# Altium PCB WorldClock.PcbDoc (part 6 of 13)
Units mil, origin at the board's own origin, x right, y up, seen from the top; angles counter-clockwise.
Board outline 3700 x 3850 mil, 2 copper layers (Top Layer, Bottom Layer); 227 components, 134 nets, 1324 pads, 248 vias.
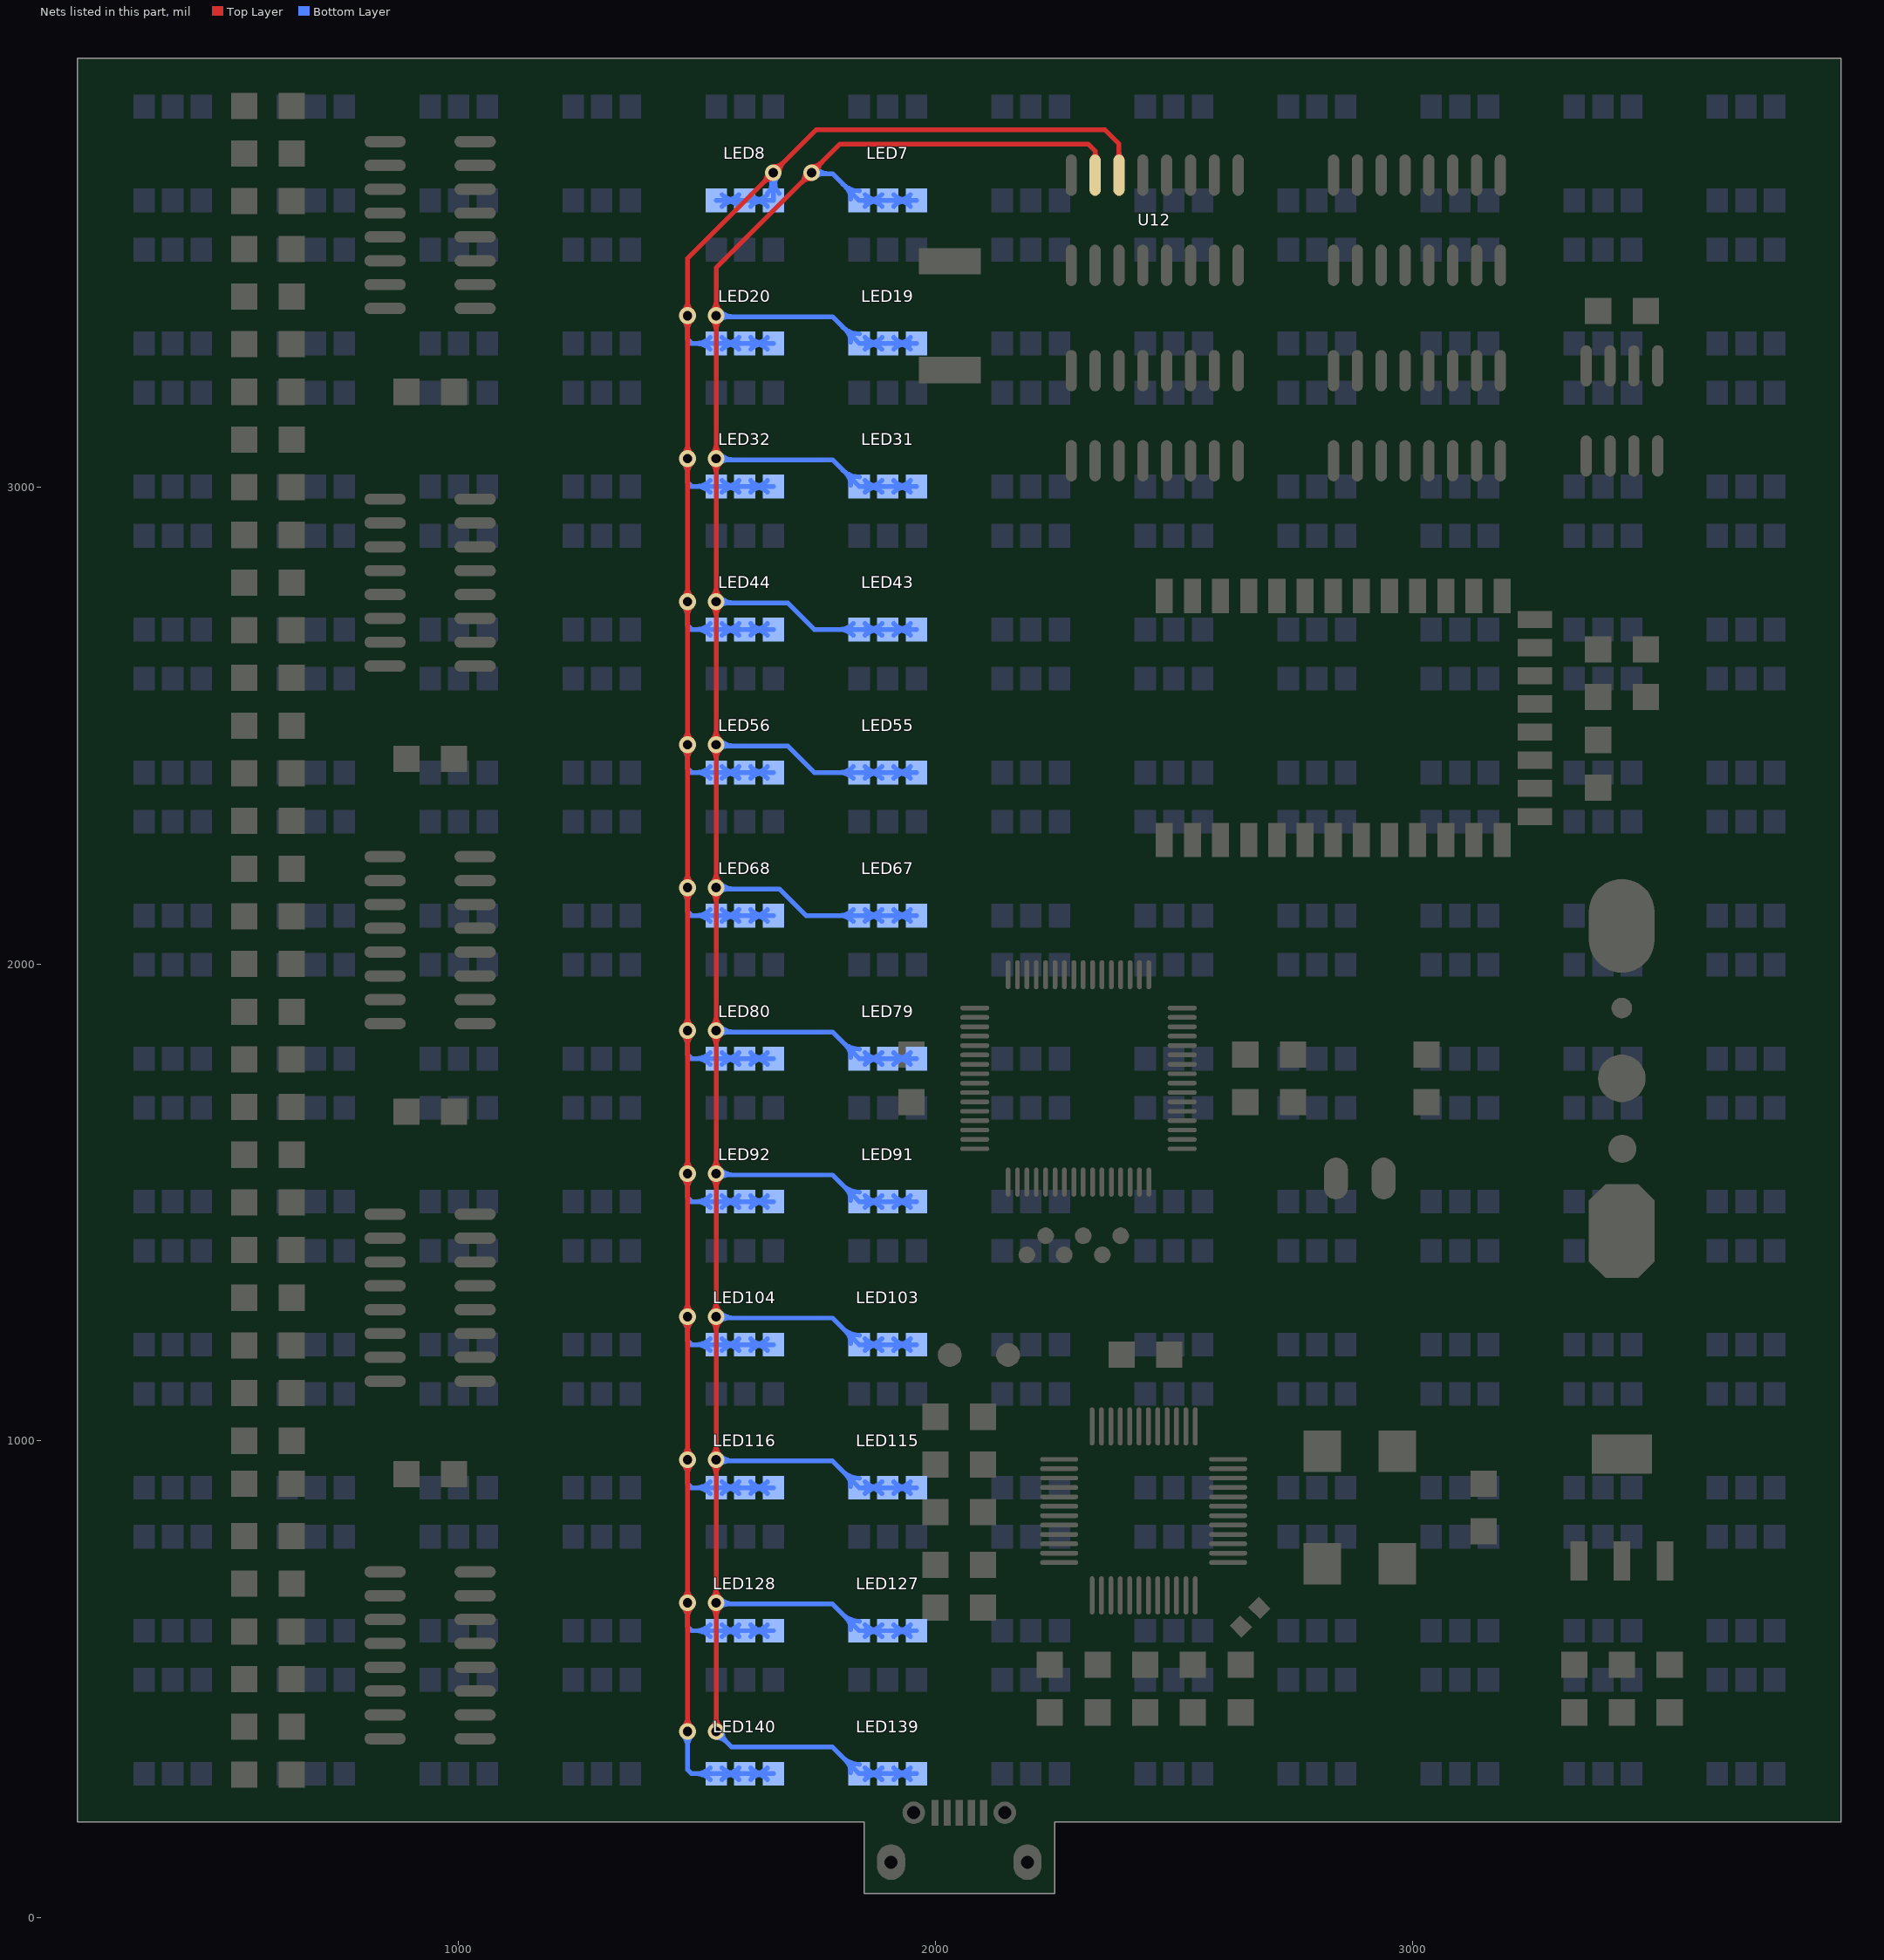
[diagram p6: the nets of this part, all layers, seen from the top]

## Via types
v1: diameter 35, hole 20, Top Layer to Bottom Layer, tented both sides, 213 vias
v2: diameter 24, hole 12, Top Layer to Bottom Layer, tented both sides, 35 vias

## Nets (pads, with @x,y where several pads share a name; then routed paths per layer and width w, separated by ;. In a path a pad name is that pad's centre, name@x,y a point inside that pad or via, vN(x,y) a via of type N, cw(c..) or ccw(c..) an arc to the next point about the centre after c; other vN are vias at no path point) (continued)
CH7: LED7.4 LED7.5 LED7.6 LED19.4 LED19.5 LED19.6 LED31.4 LED31.5 LED31.6 LED43.4 LED43.5 LED43.6 LED55.4 LED55.5 LED55.6 LED67.4 LED67.5 LED67.6 LED79.4 LED79.5 LED79.6 LED91.4 LED91.5 LED91.6 LED103.4 LED103.5 LED103.6 LED115.4 LED115.5 LED115.6 LED127.4 LED127.5 LED127.6 LED139.4 LED139.5 LED139.6 U12.15 | length 16164.9
  Top Layer w10: v1@1531.16,398.84 ccw(c1509.82,420.18) 1540,420.18 ccw(c1570.18,420.18) v1@1548.84,398.84 ; v1@1531.16,651.16 cw(c1509.82,629.82) 1540,629.82 cw(c1570.18,629.82) v1@1548.84,651.16 ; v1@1531.16,668.84 ccw(c1509.82,690.18) 1540,690.18 ccw(c1570.18,690.18) v1@1548.84,668.84 ; v1@1531.16,951.16 cw(c1509.82,929.82) 1540,929.82 cw(c1570.18,929.82) v1@1548.84,951.16 ; v1@1531.16,968.84 ccw(c1509.82,990.18) 1540,990.18 ccw(c1570.18,990.18) v1@1548.84,968.84 ; v1@1531.16,1251.16 cw(c1509.82,1229.82) 1540,1229.82 cw(c1570.18,1229.82) v1@1548.84,1251.16 ; v1@1531.16,1268.84 ccw(c1509.82,1290.18) 1540,1290.18 ccw(c1570.18,1290.18) v1@1548.84,1268.84 ; v1@1531.16,1551.16 cw(c1509.82,1529.82) 1540,1529.82 cw(c1570.18,1529.82) v1@1548.84,1551.16 ; v1@1531.16,1568.84 ccw(c1509.82,1590.18) 1540,1590.18 ccw(c1570.18,1590.18) v1@1548.84,1568.84 ; v1@1531.16,1851.16 cw(c1509.82,1829.82) 1540,1829.82 cw(c1570.18,1829.82) v1@1548.84,1851.16 ; v1@1531.16,1868.84 ccw(c1509.82,1890.18) 1540,1890.18 ccw(c1570.18,1890.18) v1@1548.84,1868.84 ; v1@1531.16,2151.16 cw(c1509.82,2129.82) 1540,2129.82 cw(c1570.18,2129.82) v1@1548.84,2151.16 ; v1@1531.16,2168.84 ccw(c1509.82,2190.18) 1540,2190.18 ccw(c1570.18,2190.18) v1@1548.84,2168.84 ; v1@1531.16,2451.16 cw(c1509.82,2429.82) 1540,2429.82 cw(c1570.18,2429.82) v1@1548.84,2451.16 ; v1@1531.16,2468.84 ccw(c1509.82,2490.18) 1540,2490.18 ccw(c1570.18,2490.18) v1@1548.84,2468.84 ; v1@1531.16,2751.16 cw(c1509.82,2729.82) 1540,2729.82 cw(c1570.18,2729.82) v1@1548.84,2751.16 ; v1@1531.16,2768.84 ccw(c1509.82,2790.18) 1540,2790.18 ccw(c1570.18,2790.18) v1@1548.84,2768.84 ; v1@1531.16,3051.16 cw(c1509.82,3029.82) 1540,3029.82 cw(c1570.18,3029.82) v1@1548.84,3051.16 ; v1@1531.16,3068.84 ccw(c1509.82,3090.18) 1540,3090.18 ccw(c1570.18,3090.18) v1@1548.84,3068.84 ; v1@1531.16,3351.16 cw(c1509.82,3329.82) 1540,3329.82 cw(c1570.18,3329.82) v1@1548.84,3351.16 ; v1@1531.16,3368.84 ccw(c1509.82,3390.18) 1540,3390.18 ccw(c1570.18,3390.18) v1@1548.84,3368.84 ; v1(1540,390) v1(1540,660) v1(1540,960) v1(1540,1260) v1(1540,1560) v1(1540,1860) v1(1540,2160) v1(1540,2460) v1(1540,2760) v1(1540,3060) v1(1540,3360) 1540,3460 1800,3720 2320,3720 2335,3705 U12.15@2335,3654.49 ; v1@1727.5,3660 cw(c1697.32,3660) 1718.66,3638.66 cw(c1740,3617.32) v1@1740,3647.5 ; v1@1740,3672.5 ccw(c1740,3702.68) 1761.34,3681.34 ccw(c1782.68,3660) v1@1752.5,3660 ; U12.15@2330.18,3690.8 ccw(c2318.56,3702.43) 2335,3702.43 ccw(c2351.44,3702.43) U12.15@2339.82,3690.8
  Bottom Layer w10: v1@1540,377.5 cw(c1540,347.32) 1561.34,368.66 cw(c1582.68,390) v1@1552.5,390 ; v1(1540,390) 1572.5,357.5 1784.07,357.5 LED139.6@1840,301.57 LED139.5@1900,301.57 LED139.4@1960,301.57 ; v1(1540,660) 1542.5,657.5 1784.07,657.5 LED127.6@1840,601.57 LED127.5@1900,601.57 LED127.4@1960,601.57 ; v1(1540,960) 1542.5,957.5 1784.07,957.5 LED115.6@1840,901.57 LED115.5@1900,901.57 LED115.4@1960,901.57 ; v1(1540,1260) 1542.5,1257.5 1784.07,1257.5 LED103.6@1840,1201.57 LED103.5@1900,1201.57 LED103.4@1960,1201.57 ; v1(1540,1560) 1542.5,1557.5 1784.07,1557.5 LED91.6@1840,1501.57 LED91.5@1900,1501.57 LED91.4@1960,1501.57 ; v1(1540,1860) 1542.5,1857.5 1784.07,1857.5 LED79.6@1840,1801.57 LED79.5@1900,1801.57 LED79.4@1960,1801.57 ; v1(1540,2160) 1542.5,2157.5 1672.5,2157.5 1728.43,2101.57 LED67.6@1840,2101.57 LED67.5@1900,2101.57 LED67.4@1960,2101.57 ; v1(1540,2460) 1542.5,2457.5 1690,2457.5 1745.93,2401.57 LED55.6@1840,2401.57 LED55.5@1900,2401.57 LED55.4@1960,2401.57 ; v1(1540,2760) 1542.5,2757.5 1690,2757.5 1745.93,2701.57 LED43.6@1840,2701.57 LED43.5@1900,2701.57 LED43.4@1960,2701.57 ; v1(1540,3060) 1542.5,3057.5 1784.07,3057.5 LED31.6@1840,3001.57 LED31.5@1900,3001.57 LED31.4@1960,3001.57 ; v1(1540,3360) 1542.5,3357.5 1784.07,3357.5 LED19.6@1840,3301.57 LED19.5@1900,3301.57 LED19.4@1960,3301.57 ; v1@1548.84,651.16 cw(c1564.14,635.86) 1564.14,657.5 ; v1@1548.84,668.84 ccw(c1576.21,696.21) 1576.21,657.5 ; v1@1548.84,951.16 cw(c1564.14,935.86) 1564.14,957.5 ; v1@1548.84,968.84 ccw(c1576.21,996.21) 1576.21,957.5 ; v1@1548.84,1251.16 cw(c1564.14,1235.86) 1564.14,1257.5 ; v1@1548.84,1268.84 ccw(c1576.21,1296.21) 1576.21,1257.5 ; v1@1548.84,1551.16 cw(c1564.14,1535.86) 1564.14,1557.5 ; v1@1548.84,1568.84 ccw(c1576.21,1596.21) 1576.21,1557.5 ; v1@1548.84,1851.16 cw(c1564.14,1835.86) 1564.14,1857.5 ; v1@1548.84,1868.84 ccw(c1576.21,1896.21) 1576.21,1857.5 ; v1@1548.84,2151.16 cw(c1564.14,2135.86) 1564.14,2157.5 ; v1@1548.84,2168.84 ccw(c1576.21,2196.21) 1576.21,2157.5 ; v1@1548.84,2451.16 cw(c1564.14,2435.86) 1564.14,2457.5 ; v1@1548.84,2468.84 ccw(c1576.21,2496.21) 1576.21,2457.5 ; v1@1548.84,2751.16 cw(c1564.14,2735.86) 1564.14,2757.5 ; v1@1548.84,2768.84 ccw(c1576.21,2796.21) 1576.21,2757.5 ; v1@1548.84,3051.16 cw(c1564.14,3035.86) 1564.14,3057.5 ; v1@1548.84,3068.84 ccw(c1576.21,3096.21) 1576.21,3057.5 ; v1@1548.84,3351.16 cw(c1564.14,3335.86) 1564.14,3357.5 ; v1@1548.84,3368.84 ccw(c1576.21,3396.21) 1576.21,3357.5 ; v1@1748.84,3651.16 cw(c1764.14,3635.86) 1764.14,3657.5 ; v1@1748.84,3668.84 ccw(c1776.21,3696.21) 1776.21,3657.5 ; v1@1750,3652.5 cw(c1760,3645) 1760,3657.5 ; v1@1752,3663.5 ccw(c1760,3665.83) 1760,3657.5 ; 1805.86,335.72 ccw(c1840,369.86) LED139.6@1840,321.57 ; 1805.86,635.72 ccw(c1840,669.86) LED127.6@1840,621.57 ; 1805.86,935.72 ccw(c1840,969.86) LED115.6@1840,921.57 ; 1805.86,1235.72 ccw(c1840,1269.86) LED103.6@1840,1221.57 ; 1805.86,1535.72 ccw(c1840,1569.86) LED91.6@1840,1521.57 ; 1805.86,1835.72 ccw(c1840,1869.86) LED79.6@1840,1821.57 ; 1805.86,3035.72 ccw(c1840,3069.86) LED31.6@1840,3021.57 ; 1805.86,3335.72 ccw(c1840,3369.86) LED19.6@1840,3321.57 ; 1805.86,3635.72 ccw(c1840,3669.86) LED7.6@1840,3621.57 ; 1811.89,329.68 cw(c1786.29,304.07) LED139.6@1822.5,304.07 ; 1811.89,629.68 cw(c1786.29,604.07) LED127.6@1822.5,604.07 ; 1811.89,929.68 cw(c1786.29,904.07) LED115.6@1822.5,904.07 ; 1811.89,1229.68 cw(c1786.29,1204.07) LED103.6@1822.5,1204.07 ; 1811.89,1529.68 cw(c1786.29,1504.07) LED91.6@1822.5,1504.07 ; 1811.89,1829.68 cw(c1786.29,1804.07) LED79.6@1822.5,1804.07 ; 1811.89,3029.68 cw(c1786.29,3004.07) LED31.6@1822.5,3004.07 ; 1811.89,3329.68 cw(c1786.29,3304.07) LED19.6@1822.5,3304.07 ; 1811.89,3629.68 cw(c1786.29,3604.07) LED7.6@1822.5,3604.07 ; LED67.6@1827.63,2089.2 ccw(c1797.75,2059.33) 1797.75,2101.57 ccw(c1797.75,2143.82) LED67.6@1827.63,2113.95 ; LED55.6@1827.63,2389.2 ccw(c1797.75,2359.33) 1797.75,2401.57 ccw(c1797.75,2443.82) LED55.6@1827.63,2413.95 ; LED43.6@1827.63,2689.2 ccw(c1797.75,2659.33) 1797.75,2701.57 ccw(c1797.75,2743.82) LED43.6@1827.63,2713.95 ; LED139.6@1852.37,289.2 cw(c1882.25,259.33) 1882.25,301.57 cw(c1882.25,343.82) LED139.6@1852.37,313.95 ; LED127.6@1852.37,589.2 cw(c1882.25,559.33) 1882.25,601.57 cw(c1882.25,643.82) LED127.6@1852.37,613.95 ; LED115.6@1852.37,889.2 cw(c1882.25,859.33) 1882.25,901.57 cw(c1882.25,943.82) LED115.6@1852.37,913.95 ; LED103.6@1852.37,1189.2 cw(c1882.25,1159.33) 1882.25,1201.57 cw(c1882.25,1243.82) LED103.6@1852.37,1213.95 ; LED91.6@1852.37,1489.2 cw(c1882.25,1459.33) 1882.25,1501.57 cw(c1882.25,1543.82) LED91.6@1852.37,1513.95 ; LED79.6@1852.37,1789.2 cw(c1882.25,1759.33) 1882.25,1801.57 cw(c1882.25,1843.82) LED79.6@1852.37,1813.95 ; LED67.6@1852.37,2089.2 cw(c1882.25,2059.33) 1882.25,2101.57 cw(c1882.25,2143.82) LED67.6@1852.37,2113.95 ; LED55.6@1852.37,2389.2 cw(c1882.25,2359.33) 1882.25,2401.57 cw(c1882.25,2443.82) LED55.6@1852.37,2413.95 ; LED43.6@1852.37,2689.2 cw(c1882.25,2659.33) 1882.25,2701.57 cw(c1882.25,2743.82) LED43.6@1852.37,2713.95 ; LED31.6@1852.37,2989.2 cw(c1882.25,2959.33) 1882.25,3001.57 cw(c1882.25,3043.82) LED31.6@1852.37,3013.95 ; LED19.6@1852.37,3289.2 cw(c1882.25,3259.33) 1882.25,3301.57 cw(c1882.25,3343.82) LED19.6@1852.37,3313.95 ; LED7.6@1852.37,3589.2 cw(c1882.25,3559.33) 1882.25,3601.57 cw(c1882.25,3643.82) LED7.6@1852.37,3613.95 ; LED139.6@1855.16,295.32 cw(c1871.02,286.17) 1866.28,303.86 ; LED139.6@1855.16,307.82 ccw(c1871.02,316.98) 1866.28,299.29 ; LED127.6@1855.16,595.32 cw(c1871.02,586.17) 1866.28,603.86 ; LED127.6@1855.16,607.82 ccw(c1871.02,616.98) 1866.28,599.29 ; LED115.6@1855.16,895.32 cw(c1871.02,886.17) 1866.28,903.86 ; LED115.6@1855.16,907.82 ccw(c1871.02,916.98) 1866.28,899.29 ; LED103.6@1855.16,1195.32 cw(c1871.02,1186.17) 1866.28,1203.86 ; LED103.6@1855.16,1207.82 ccw(c1871.02,1216.98) 1866.28,1199.29 ; LED91.6@1855.16,1495.32 cw(c1871.02,1486.17) 1866.28,1503.86 ; LED91.6@1855.16,1507.82 ccw(c1871.02,1516.98) 1866.28,1499.29 ; LED79.6@1855.16,1795.32 cw(c1871.02,1786.17) 1866.28,1803.86 ; LED79.6@1855.16,1807.82 ccw(c1871.02,1816.98) 1866.28,1799.29 ; LED67.6@1855.16,2095.32 cw(c1871.02,2086.17) 1866.28,2103.86 ; LED67.6@1855.16,2107.82 ccw(c1871.02,2116.98) 1866.28,2099.29 ; LED55.6@1855.16,2395.32 cw(c1871.02,2386.17) 1866.28,2403.86 ; LED55.6@1855.16,2407.82 ccw(c1871.02,2416.98) 1866.28,2399.29 ; LED43.6@1855.16,2695.32 cw(c1871.02,2686.17) 1866.28,2703.86 ; LED43.6@1855.16,2707.82 ccw(c1871.02,2716.98) 1866.28,2699.29 ; LED31.6@1855.16,2995.32 cw(c1871.02,2986.17) 1866.28,3003.86 ; LED31.6@1855.16,3007.82 ccw(c1871.02,3016.98) 1866.28,2999.29 ; LED19.6@1855.16,3295.32 cw(c1871.02,3286.17) 1866.28,3303.86 ; LED19.6@1855.16,3307.82 ccw(c1871.02,3316.98) 1866.28,3299.29 ; LED7.6@1855.16,3595.32 cw(c1871.02,3586.17) 1866.28,3603.86 ; LED7.6@1855.16,3607.82 ccw(c1871.02,3616.98) 1866.28,3599.29 ; LED139.6@1856.56,293.41 cw(c1864.87,290.57) 1867.15,299.06 ; LED139.6@1856.56,309.74 ccw(c1864.87,312.58) 1867.15,304.09 ; LED127.6@1856.56,593.41 cw(c1864.87,590.57) 1867.15,599.06 ; LED127.6@1856.56,609.74 ccw(c1864.87,612.58) 1867.15,604.09 ; LED115.6@1856.56,893.41 cw(c1864.87,890.57) 1867.15,899.06 ; LED115.6@1856.56,909.74 ccw(c1864.87,912.58) 1867.15,904.09 ; LED103.6@1856.56,1193.41 cw(c1864.87,1190.57) 1867.15,1199.06 ; LED103.6@1856.56,1209.74 ccw(c1864.87,1212.58) 1867.15,1204.09 ; LED91.6@1856.56,1493.41 cw(c1864.87,1490.57) 1867.15,1499.06 ; LED91.6@1856.56,1509.74 ccw(c1864.87,1512.58) 1867.15,1504.09 ; LED79.6@1856.56,1793.41 cw(c1864.87,1790.57) 1867.15,1799.06 ; LED79.6@1856.56,1809.74 ccw(c1864.87,1812.58) 1867.15,1804.09 ; LED67.6@1856.56,2093.41 cw(c1864.87,2090.57) 1867.15,2099.06 ; LED67.6@1856.56,2109.74 ccw(c1864.87,2112.58) 1867.15,2104.09 ; LED55.6@1856.56,2393.41 cw(c1864.87,2390.57) 1867.15,2399.06 ; LED55.6@1856.56,2409.74 ccw(c1864.87,2412.58) 1867.15,2404.09 ; LED43.6@1856.56,2693.41 cw(c1864.87,2690.57) 1867.15,2699.06 ; LED43.6@1856.56,2709.74 ccw(c1864.87,2712.58) 1867.15,2704.09 ; LED31.6@1856.56,2993.41 cw(c1864.87,2990.57) 1867.15,2999.06 ; LED31.6@1856.56,3009.74 ccw(c1864.87,3012.58) 1867.15,3004.09 ; LED19.6@1856.56,3293.41 cw(c1864.87,3290.57) 1867.15,3299.06 ; LED19.6@1856.56,3309.74 ccw(c1864.87,3312.58) 1867.15,3304.09 ; LED7.6@1856.56,3593.41 cw(c1864.87,3590.57) 1867.15,3599.06 ; LED7.6@1856.56,3609.74 ccw(c1864.87,3612.58) 1867.15,3604.09 ; LED139.5@1887.63,289.2 ccw(c1857.75,259.33) 1857.75,301.57 ccw(c1857.75,343.82) LED139.5@1887.63,313.95 ; LED127.5@1887.63,589.2 ccw(c1857.75,559.33) 1857.75,601.57 ccw(c1857.75,643.82) LED127.5@1887.63,613.95 ; LED115.5@1887.63,889.2 ccw(c1857.75,859.33) 1857.75,901.57 ccw(c1857.75,943.82) LED115.5@1887.63,913.95 ; LED103.5@1887.63,1189.2 ccw(c1857.75,1159.33) 1857.75,1201.57 ccw(c1857.75,1243.82) LED103.5@1887.63,1213.95 ; LED91.5@1887.63,1489.2 ccw(c1857.75,1459.33) 1857.75,1501.57 ccw(c1857.75,1543.82) LED91.5@1887.63,1513.95 ; LED79.5@1887.63,1789.2 ccw(c1857.75,1759.33) 1857.75,1801.57 ccw(c1857.75,1843.82) LED79.5@1887.63,1813.95 ; LED67.5@1887.63,2089.2 ccw(c1857.75,2059.33) 1857.75,2101.57 ccw(c1857.75,2143.82) LED67.5@1887.63,2113.95 ; LED55.5@1887.63,2389.2 ccw(c1857.75,2359.33) 1857.75,2401.57 ccw(c1857.75,2443.82) LED55.5@1887.63,2413.95 ; LED43.5@1887.63,2689.2 ccw(c1857.75,2659.33) 1857.75,2701.57 ccw(c1857.75,2743.82) LED43.5@1887.63,2713.95 ; LED31.5@1887.63,2989.2 ccw(c1857.75,2959.33) 1857.75,3001.57 ccw(c1857.75,3043.82) LED31.5@1887.63,3013.95 ; LED19.5@1887.63,3289.2 ccw(c1857.75,3259.33) 1857.75,3301.57 ccw(c1857.75,3343.82) LED19.5@1887.63,3313.95 ; LED7.5@1887.63,3589.2 ccw(c1857.75,3559.33) 1857.75,3601.57 ccw(c1857.75,3643.82) LED7.5@1887.63,3613.95 ; LED139.5@1912.37,289.2 cw(c1942.25,259.33) 1942.25,301.57 cw(c1942.25,343.82) LED139.5@1912.37,313.95 ; LED127.5@1912.37,589.2 cw(c1942.25,559.33) 1942.25,601.57 cw(c1942.25,643.82) LED127.5@1912.37,613.95 ; LED115.5@1912.37,889.2 cw(c1942.25,859.33) 1942.25,901.57 cw(c1942.25,943.82) LED115.5@1912.37,913.95 ; LED103.5@1912.37,1189.2 cw(c1942.25,1159.33) 1942.25,1201.57 cw(c1942.25,1243.82) LED103.5@1912.37,1213.95 ; LED91.5@1912.37,1489.2 cw(c1942.25,1459.33) 1942.25,1501.57 cw(c1942.25,1543.82) LED91.5@1912.37,1513.95 ; LED79.5@1912.37,1789.2 cw(c1942.25,1759.33) 1942.25,1801.57 cw(c1942.25,1843.82) LED79.5@1912.37,1813.95 ; LED67.5@1912.37,2089.2 cw(c1942.25,2059.33) 1942.25,2101.57 cw(c1942.25,2143.82) LED67.5@1912.37,2113.95 ; LED55.5@1912.37,2389.2 cw(c1942.25,2359.33) 1942.25,2401.57 cw(c1942.25,2443.82) LED55.5@1912.37,2413.95 ; LED43.5@1912.37,2689.2 cw(c1942.25,2659.33) 1942.25,2701.57 cw(c1942.25,2743.82) LED43.5@1912.37,2713.95 ; LED31.5@1912.37,2989.2 cw(c1942.25,2959.33) 1942.25,3001.57 cw(c1942.25,3043.82) LED31.5@1912.37,3013.95 ; LED19.5@1912.37,3289.2 cw(c1942.25,3259.33) 1942.25,3301.57 cw(c1942.25,3343.82) LED19.5@1912.37,3313.95 ; LED7.5@1912.37,3589.2 cw(c1942.25,3559.33) 1942.25,3601.57 cw(c1942.25,3643.82) LED7.5@1912.37,3613.95 ; 1932.85,299.06 cw(c1935.13,290.57) LED139.4@1943.44,293.41 ; 1932.85,304.09 ccw(c1935.13,312.58) LED139.4@1943.44,309.74 ; 1932.85,599.06 cw(c1935.13,590.57) LED127.4@1943.44,593.41 ; 1932.85,604.09 ccw(c1935.13,612.58) LED127.4@1943.44,609.74 ; 1932.85,899.06 cw(c1935.13,890.57) LED115.4@1943.44,893.41 ; 1932.85,904.09 ccw(c1935.13,912.58) LED115.4@1943.44,909.74 ; 1932.85,1199.06 cw(c1935.13,1190.57) LED103.4@1943.44,1193.41 ; 1932.85,1204.09 ccw(c1935.13,1212.58) LED103.4@1943.44,1209.74 ; 1932.85,1499.06 cw(c1935.13,1490.57) LED91.4@1943.44,1493.41 ; 1932.85,1504.09 ccw(c1935.13,1512.58) LED91.4@1943.44,1509.74 ; 1932.85,1799.06 cw(c1935.13,1790.57) LED79.4@1943.44,1793.41 ; 1932.85,1804.09 ccw(c1935.13,1812.58) LED79.4@1943.44,1809.74 ; 1932.85,2099.06 cw(c1935.13,2090.57) LED67.4@1943.44,2093.41 ; 1932.85,2104.09 ccw(c1935.13,2112.58) LED67.4@1943.44,2109.74 ; 1932.85,2399.06 cw(c1935.13,2390.57) LED55.4@1943.44,2393.41 ; 1932.85,2404.09 ccw(c1935.13,2412.58) LED55.4@1943.44,2409.74 ; 1932.85,2699.06 cw(c1935.13,2690.57) LED43.4@1943.44,2693.41 ; 1932.85,2704.09 ccw(c1935.13,2712.58) LED43.4@1943.44,2709.74 ; 1932.85,2999.06 cw(c1935.13,2990.57) LED31.4@1943.44,2993.41 ; 1932.85,3004.09 ccw(c1935.13,3012.58) LED31.4@1943.44,3009.74 ; 1932.85,3299.06 cw(c1935.13,3290.57) LED19.4@1943.44,3293.41 ; 1932.85,3304.09 ccw(c1935.13,3312.58) LED19.4@1943.44,3309.74 ; 1932.85,3599.06 cw(c1935.13,3590.57) LED7.4@1943.44,3593.41 ; 1932.85,3604.09 ccw(c1935.13,3612.58) LED7.4@1943.44,3609.74 ; 1933.72,299.29 ccw(c1928.98,316.98) LED139.4@1944.84,307.82 ; 1933.72,303.86 cw(c1928.98,286.17) LED139.4@1944.84,295.32 ; 1933.72,599.29 ccw(c1928.98,616.98) LED127.4@1944.84,607.82 ; 1933.72,603.86 cw(c1928.98,586.17) LED127.4@1944.84,595.32 ; 1933.72,899.29 ccw(c1928.98,916.98) LED115.4@1944.84,907.82 ; 1933.72,903.86 cw(c1928.98,886.17) LED115.4@1944.84,895.32 ; 1933.72,1199.29 ccw(c1928.98,1216.98) LED103.4@1944.84,1207.82 ; 1933.72,1203.86 cw(c1928.98,1186.17) LED103.4@1944.84,1195.32 ; 1933.72,1499.29 ccw(c1928.98,1516.98) LED91.4@1944.84,1507.82 ; 1933.72,1503.86 cw(c1928.98,1486.17) LED91.4@1944.84,1495.32 ; 1933.72,1799.29 ccw(c1928.98,1816.98) LED79.4@1944.84,1807.82 ; 1933.72,1803.86 cw(c1928.98,1786.17) LED79.4@1944.84,1795.32 ; 1933.72,2099.29 ccw(c1928.98,2116.98) LED67.4@1944.84,2107.82 ; 1933.72,2103.86 cw(c1928.98,2086.17) LED67.4@1944.84,2095.32 ; 1933.72,2399.29 ccw(c1928.98,2416.98) LED55.4@1944.84,2407.82 ; 1933.72,2403.86 cw(c1928.98,2386.17) LED55.4@1944.84,2395.32 ; 1933.72,2699.29 ccw(c1928.98,2716.98) LED43.4@1944.84,2707.82 ; 1933.72,2703.86 cw(c1928.98,2686.17) LED43.4@1944.84,2695.32 ; 1933.72,2999.29 ccw(c1928.98,3016.98) LED31.4@1944.84,3007.82 ; 1933.72,3003.86 cw(c1928.98,2986.17) LED31.4@1944.84,2995.32 ; 1933.72,3299.29 ccw(c1928.98,3316.98) LED19.4@1944.84,3307.82 ; 1933.72,3303.86 cw(c1928.98,3286.17) LED19.4@1944.84,3295.32 ; 1933.72,3599.29 ccw(c1928.98,3616.98) LED7.4@1944.84,3607.82 ; 1933.72,3603.86 cw(c1928.98,3586.17) LED7.4@1944.84,3595.32 ; LED139.4@1947.63,289.2 ccw(c1917.75,259.33) 1917.75,301.57 ccw(c1917.75,343.82) LED139.4@1947.63,313.95 ; LED127.4@1947.63,589.2 ccw(c1917.75,559.33) 1917.75,601.57 ccw(c1917.75,643.82) LED127.4@1947.63,613.95 ; LED115.4@1947.63,889.2 ccw(c1917.75,859.33) 1917.75,901.57 ccw(c1917.75,943.82) LED115.4@1947.63,913.95 ; LED103.4@1947.63,1189.2 ccw(c1917.75,1159.33) 1917.75,1201.57 ccw(c1917.75,1243.82) LED103.4@1947.63,1213.95 ; LED91.4@1947.63,1489.2 ccw(c1917.75,1459.33) 1917.75,1501.57 ccw(c1917.75,1543.82) LED91.4@1947.63,1513.95 ; LED79.4@1947.63,1789.2 ccw(c1917.75,1759.33) 1917.75,1801.57 ccw(c1917.75,1843.82) LED79.4@1947.63,1813.95 ; LED67.4@1947.63,2089.2 ccw(c1917.75,2059.33) 1917.75,2101.57 ccw(c1917.75,2143.82) LED67.4@1947.63,2113.95 ; LED55.4@1947.63,2389.2 ccw(c1917.75,2359.33) 1917.75,2401.57 ccw(c1917.75,2443.82) LED55.4@1947.63,2413.95 ; LED43.4@1947.63,2689.2 ccw(c1917.75,2659.33) 1917.75,2701.57 ccw(c1917.75,2743.82) LED43.4@1947.63,2713.95 ; LED31.4@1947.63,2989.2 ccw(c1917.75,2959.33) 1917.75,3001.57 ccw(c1917.75,3043.82) LED31.4@1947.63,3013.95 ; LED19.4@1947.63,3289.2 ccw(c1917.75,3259.33) 1917.75,3301.57 ccw(c1917.75,3343.82) LED19.4@1947.63,3313.95 ; LED7.4@1947.63,3589.2 ccw(c1917.75,3559.33) 1917.75,3601.57 ccw(c1917.75,3643.82) LED7.4@1947.63,3613.95 ; LED7.4@1960,3601.57 LED7.5@1900,3601.57 LED7.6@1840,3601.57 1784.07,3657.5 1760,3657.5
  other v1: 1740,3660
CH8: LED8.4 LED8.5 LED8.6 LED20.4 LED20.5 LED20.6 LED32.4 LED32.5 LED32.6 LED44.4 LED44.5 LED44.6 LED56.4 LED56.5 LED56.6 LED68.4 LED68.5 LED68.6 LED80.4 LED80.5 LED80.6 LED92.4 LED92.5 LED92.6 LED104.4 LED104.5 LED104.6 LED116.4 LED116.5 LED116.6 LED128.4 LED128.5 LED128.6 LED140.4 LED140.5 LED140.6 U12.14 | length 14025.2
  Top Layer w10: v1@1471.16,398.84 ccw(c1449.82,420.18) 1480,420.18 ccw(c1510.18,420.18) v1@1488.84,398.84 ; v1@1471.16,651.16 cw(c1449.82,629.82) 1480,629.82 cw(c1510.18,629.82) v1@1488.84,651.16 ; v1@1471.16,668.84 ccw(c1449.82,690.18) 1480,690.18 ccw(c1510.18,690.18) v1@1488.84,668.84 ; v1@1471.16,951.16 cw(c1449.82,929.82) 1480,929.82 cw(c1510.18,929.82) v1@1488.84,951.16 ; v1@1471.16,968.84 ccw(c1449.82,990.18) 1480,990.18 ccw(c1510.18,990.18) v1@1488.84,968.84 ; v1@1471.16,1251.16 cw(c1449.82,1229.82) 1480,1229.82 cw(c1510.18,1229.82) v1@1488.84,1251.16 ; v1@1471.16,1268.84 ccw(c1449.82,1290.18) 1480,1290.18 ccw(c1510.18,1290.18) v1@1488.84,1268.84 ; v1@1471.16,1551.16 cw(c1449.82,1529.82) 1480,1529.82 cw(c1510.18,1529.82) v1@1488.84,1551.16 ; v1@1471.16,1568.84 ccw(c1449.82,1590.18) 1480,1590.18 ccw(c1510.18,1590.18) v1@1488.84,1568.84 ; v1@1471.16,1851.16 cw(c1449.82,1829.82) 1480,1829.82 cw(c1510.18,1829.82) v1@1488.84,1851.16 ; v1@1471.16,1868.84 ccw(c1449.82,1890.18) 1480,1890.18 ccw(c1510.18,1890.18) v1@1488.84,1868.84 ; v1@1471.16,2151.16 cw(c1449.82,2129.82) 1480,2129.82 cw(c1510.18,2129.82) v1@1488.84,2151.16 ; v1@1471.16,2168.84 ccw(c1449.82,2190.18) 1480,2190.18 ccw(c1510.18,2190.18) v1@1488.84,2168.84 ; v1@1471.16,2451.16 cw(c1449.82,2429.82) 1480,2429.82 cw(c1510.18,2429.82) v1@1488.84,2451.16 ; v1@1471.16,2468.84 ccw(c1449.82,2490.18) 1480,2490.18 ccw(c1510.18,2490.18) v1@1488.84,2468.84 ; v1@1471.16,2751.16 cw(c1449.82,2729.82) 1480,2729.82 cw(c1510.18,2729.82) v1@1488.84,2751.16 ; v1@1471.16,2768.84 ccw(c1449.82,2790.18) 1480,2790.18 ccw(c1510.18,2790.18) v1@1488.84,2768.84 ; v1@1471.16,3051.16 cw(c1449.82,3029.82) 1480,3029.82 cw(c1510.18,3029.82) v1@1488.84,3051.16 ; v1@1471.16,3068.84 ccw(c1449.82,3090.18) 1480,3090.18 ccw(c1510.18,3090.18) v1@1488.84,3068.84 ; v1@1471.16,3351.16 cw(c1449.82,3329.82) 1480,3329.82 cw(c1510.18,3329.82) v1@1488.84,3351.16 ; v1@1471.16,3368.84 ccw(c1449.82,3390.18) 1480,3390.18 ccw(c1510.18,3390.18) v1@1488.84,3368.84 ; v1(1480,390) v1(1480,660) v1(1480,960) v1(1480,1260) v1(1480,1560) v1(1480,1860) v1(1480,2160) v1(1480,2460) v1(1480,2760) v1(1480,3060) v1(1480,3360) 1480,3480 v1(1660,3660) 1750,3750 2355,3750 2385,3720 U12.14@2385,3654.49 ; v1@1647.5,3660 cw(c1617.32,3660) 1638.66,3638.66 cw(c1660,3617.32) v1@1660,3647.5 ; v1@1660,3672.5 ccw(c1660,3702.68) 1681.34,3681.34 ccw(c1702.68,3660) v1@1672.5,3660 ; U12.14@2380.18,3690.8 ccw(c2368.56,3702.43) 2385,3702.43 ccw(c2401.44,3702.43) U12.14@2389.82,3690.8
  Bottom Layer w10: v1@1471.16,381.16 cw(c1449.82,359.82) 1480,359.82 cw(c1510.18,359.82) v1@1488.84,381.16 ; v1@1471.16,651.16 cw(c1449.82,629.82) 1480,629.82 cw(c1510.18,629.82) v1@1488.84,651.16 ; v1@1471.16,951.16 cw(c1449.82,929.82) 1480,929.82 cw(c1510.18,929.82) v1@1488.84,951.16 ; v1@1471.16,1251.16 cw(c1449.82,1229.82) 1480,1229.82 cw(c1510.18,1229.82) v1@1488.84,1251.16 ; v1@1471.16,1551.16 cw(c1449.82,1529.82) 1480,1529.82 cw(c1510.18,1529.82) v1@1488.84,1551.16 ; v1@1471.16,1851.16 cw(c1449.82,1829.82) 1480,1829.82 cw(c1510.18,1829.82) v1@1488.84,1851.16 ; v1@1471.16,2151.16 cw(c1449.82,2129.82) 1480,2129.82 cw(c1510.18,2129.82) v1@1488.84,2151.16 ; v1@1471.16,2451.16 cw(c1449.82,2429.82) 1480,2429.82 cw(c1510.18,2429.82) v1@1488.84,2451.16 ; v1@1471.16,2751.16 cw(c1449.82,2729.82) 1480,2729.82 cw(c1510.18,2729.82) v1@1488.84,2751.16 ; v1@1471.16,3051.16 cw(c1449.82,3029.82) 1480,3029.82 cw(c1510.18,3029.82) v1@1488.84,3051.16 ; v1@1471.16,3351.16 cw(c1449.82,3329.82) 1480,3329.82 cw(c1510.18,3329.82) v1@1488.84,3351.16 ; v1(1480,390) 1480,310 1488.43,301.57 LED140.6@1540,301.57 LED140.5@1600,301.57 LED140.4@1660,301.57 ; v1(1480,660) 1480,610 1488.43,601.57 LED128.6@1540,601.57 LED128.5@1600,601.57 LED128.4@1660,601.57 ; v1(1480,960) 1480,910 1488.43,901.57 LED116.6@1540,901.57 LED116.5@1600,901.57 LED116.4@1660,901.57 ; v1(1480,1260) 1480,1210 1488.43,1201.57 LED104.6@1540,1201.57 LED104.5@1600,1201.57 LED104.4@1660,1201.57 ; v1(1480,1560) 1480,1510 1488.43,1501.57 LED92.6@1540,1501.57 LED92.5@1600,1501.57 LED92.4@1660,1501.57 ; v1(1480,1860) 1480,1810 1488.43,1801.57 LED80.6@1540,1801.57 LED80.5@1600,1801.57 LED80.4@1660,1801.57 ; v1(1480,2160) 1480,2110 1488.43,2101.57 LED68.6@1540,2101.57 LED68.5@1600,2101.57 LED68.4@1660,2101.57 ; v1(1480,2460) 1480,2410 1488.43,2401.57 LED56.6@1540,2401.57 LED56.5@1600,2401.57 LED56.4@1660,2401.57 ; v1(1480,2760) 1480,2710 1488.43,2701.57 LED44.6@1540,2701.57 LED44.5@1600,2701.57 LED44.4@1660,2701.57 ; v1(1480,3060) 1480,3010 1488.43,3001.57 LED32.6@1540,3001.57 LED32.5@1600,3001.57 LED32.4@1660,3001.57 ; v1(1480,3360) 1480,3310 1488.43,3301.57 LED20.6@1540,3301.57 LED20.5@1600,3301.57 LED20.4@1660,3301.57 ; LED140.6@1527.63,289.2 ccw(c1497.75,259.33) 1497.75,301.57 ccw(c1497.75,343.82) LED140.6@1527.63,313.95 ; LED128.6@1527.63,589.2 ccw(c1497.75,559.33) 1497.75,601.57 ccw(c1497.75,643.82) LED128.6@1527.63,613.95 ; LED116.6@1527.63,889.2 ccw(c1497.75,859.33) 1497.75,901.57 ccw(c1497.75,943.82) LED116.6@1527.63,913.95 ; LED104.6@1527.63,1189.2 ccw(c1497.75,1159.33) 1497.75,1201.57 ccw(c1497.75,1243.82) LED104.6@1527.63,1213.95 ; LED92.6@1527.63,1489.2 ccw(c1497.75,1459.33) 1497.75,1501.57 ccw(c1497.75,1543.82) LED92.6@1527.63,1513.95 ; LED80.6@1527.63,1789.2 ccw(c1497.75,1759.33) 1497.75,1801.57 ccw(c1497.75,1843.82) LED80.6@1527.63,1813.95 ; LED68.6@1527.63,2089.2 ccw(c1497.75,2059.33) 1497.75,2101.57 ccw(c1497.75,2143.82) LED68.6@1527.63,2113.95 ; LED56.6@1527.63,2389.2 ccw(c1497.75,2359.33) 1497.75,2401.57 ccw(c1497.75,2443.82) LED56.6@1527.63,2413.95 ; LED44.6@1527.63,2689.2 ccw(c1497.75,2659.33) 1497.75,2701.57 ccw(c1497.75,2743.82) LED44.6@1527.63,2713.95 ; LED32.6@1527.63,2989.2 ccw(c1497.75,2959.33) 1497.75,3001.57 ccw(c1497.75,3043.82) LED32.6@1527.63,3013.95 ; LED20.6@1527.63,3289.2 ccw(c1497.75,3259.33) 1497.75,3301.57 ccw(c1497.75,3343.82) LED20.6@1527.63,3313.95 ; LED8.6@1540,3601.57 LED8.5@1600,3601.57 LED8.4@1660,3601.57 v1(1660,3660) ; LED140.6@1552.37,289.2 cw(c1582.25,259.33) 1582.25,301.57 cw(c1582.25,343.82) LED140.6@1552.37,313.95 ; LED128.6@1552.37,589.2 cw(c1582.25,559.33) 1582.25,601.57 cw(c1582.25,643.82) LED128.6@1552.37,613.95 ; LED116.6@1552.37,889.2 cw(c1582.25,859.33) 1582.25,901.57 cw(c1582.25,943.82) LED116.6@1552.37,913.95 ; LED104.6@1552.37,1189.2 cw(c1582.25,1159.33) 1582.25,1201.57 cw(c1582.25,1243.82) LED104.6@1552.37,1213.95 ; LED92.6@1552.37,1489.2 cw(c1582.25,1459.33) 1582.25,1501.57 cw(c1582.25,1543.82) LED92.6@1552.37,1513.95 ; LED80.6@1552.37,1789.2 cw(c1582.25,1759.33) 1582.25,1801.57 cw(c1582.25,1843.82) LED80.6@1552.37,1813.95 ; LED68.6@1552.37,2089.2 cw(c1582.25,2059.33) 1582.25,2101.57 cw(c1582.25,2143.82) LED68.6@1552.37,2113.95 ; LED56.6@1552.37,2389.2 cw(c1582.25,2359.33) 1582.25,2401.57 cw(c1582.25,2443.82) LED56.6@1552.37,2413.95 ; LED44.6@1552.37,2689.2 cw(c1582.25,2659.33) 1582.25,2701.57 cw(c1582.25,2743.82) LED44.6@1552.37,2713.95 ; LED32.6@1552.37,2989.2 cw(c1582.25,2959.33) 1582.25,3001.57 cw(c1582.25,3043.82) LED32.6@1552.37,3013.95 ; LED20.6@1552.37,3289.2 cw(c1582.25,3259.33) 1582.25,3301.57 cw(c1582.25,3343.82) LED20.6@1552.37,3313.95 ; LED8.6@1552.37,3589.2 cw(c1582.25,3559.33) 1582.25,3601.57 cw(c1582.25,3643.82) LED8.6@1552.37,3613.95 ; 1572.85,299.06 cw(c1575.13,290.57) LED140.5@1583.44,293.41 ; 1572.85,304.09 ccw(c1575.13,312.58) LED140.5@1583.44,309.74 ; 1572.85,599.06 cw(c1575.13,590.57) LED128.5@1583.44,593.41 ; 1572.85,604.09 ccw(c1575.13,612.58) LED128.5@1583.44,609.74 ; 1572.85,899.06 cw(c1575.13,890.57) LED116.5@1583.44,893.41 ; 1572.85,904.09 ccw(c1575.13,912.58) LED116.5@1583.44,909.74 ; 1572.85,1199.06 cw(c1575.13,1190.57) LED104.5@1583.44,1193.41 ; 1572.85,1204.09 ccw(c1575.13,1212.58) LED104.5@1583.44,1209.74 ; 1572.85,1499.06 cw(c1575.13,1490.57) LED92.5@1583.44,1493.41 ; 1572.85,1504.09 ccw(c1575.13,1512.58) LED92.5@1583.44,1509.74 ; 1572.85,1799.06 cw(c1575.13,1790.57) LED80.5@1583.44,1793.41 ; 1572.85,1804.09 ccw(c1575.13,1812.58) LED80.5@1583.44,1809.74 ; 1572.85,2099.06 cw(c1575.13,2090.57) LED68.5@1583.44,2093.41 ; 1572.85,2104.09 ccw(c1575.13,2112.58) LED68.5@1583.44,2109.74 ; 1572.85,2399.06 cw(c1575.13,2390.57) LED56.5@1583.44,2393.41 ; 1572.85,2404.09 ccw(c1575.13,2412.58) LED56.5@1583.44,2409.74 ; 1572.85,2699.06 cw(c1575.13,2690.57) LED44.5@1583.44,2693.41 ; 1572.85,2704.09 ccw(c1575.13,2712.58) LED44.5@1583.44,2709.74 ; 1572.85,2999.06 cw(c1575.13,2990.57) LED32.5@1583.44,2993.41 ; 1572.85,3004.09 ccw(c1575.13,3012.58) LED32.5@1583.44,3009.74 ; 1572.85,3299.06 cw(c1575.13,3290.57) LED20.5@1583.44,3293.41 ; 1572.85,3304.09 ccw(c1575.13,3312.58) LED20.5@1583.44,3309.74 ; 1572.85,3599.06 cw(c1575.13,3590.57) LED8.5@1583.44,3593.41 ; 1572.85,3604.09 ccw(c1575.13,3612.58) LED8.5@1583.44,3609.74 ; 1573.72,299.29 ccw(c1568.98,316.98) LED140.5@1584.84,307.82 ; 1573.72,303.86 cw(c1568.98,286.17) LED140.5@1584.84,295.32 ; 1573.72,599.29 ccw(c1568.98,616.98) LED128.5@1584.84,607.82 ; 1573.72,603.86 cw(c1568.98,586.17) LED128.5@1584.84,595.32 ; 1573.72,899.29 ccw(c1568.98,916.98) LED116.5@1584.84,907.82 ; 1573.72,903.86 cw(c1568.98,886.17) LED116.5@1584.84,895.32 ; 1573.72,1199.29 ccw(c1568.98,1216.98) LED104.5@1584.84,1207.82 ; 1573.72,1203.86 cw(c1568.98,1186.17) LED104.5@1584.84,1195.32 ; 1573.72,1499.29 ccw(c1568.98,1516.98) LED92.5@1584.84,1507.82 ; 1573.72,1503.86 cw(c1568.98,1486.17) LED92.5@1584.84,1495.32 ; 1573.72,1799.29 ccw(c1568.98,1816.98) LED80.5@1584.84,1807.82 ; 1573.72,1803.86 cw(c1568.98,1786.17) LED80.5@1584.84,1795.32 ; 1573.72,2099.29 ccw(c1568.98,2116.98) LED68.5@1584.84,2107.82 ; 1573.72,2103.86 cw(c1568.98,2086.17) LED68.5@1584.84,2095.32 ; 1573.72,2399.29 ccw(c1568.98,2416.98) LED56.5@1584.84,2407.82 ; 1573.72,2403.86 cw(c1568.98,2386.17) LED56.5@1584.84,2395.32 ; 1573.72,2699.29 ccw(c1568.98,2716.98) LED44.5@1584.84,2707.82 ; 1573.72,2703.86 cw(c1568.98,2686.17) LED44.5@1584.84,2695.32 ; 1573.72,2999.29 ccw(c1568.98,3016.98) LED32.5@1584.84,3007.82 ; 1573.72,3003.86 cw(c1568.98,2986.17) LED32.5@1584.84,2995.32 ; 1573.72,3299.29 ccw(c1568.98,3316.98) LED20.5@1584.84,3307.82 ; 1573.72,3303.86 cw(c1568.98,3286.17) LED20.5@1584.84,3295.32 ; 1573.72,3599.29 ccw(c1568.98,3616.98) LED8.5@1584.84,3607.82 ; 1573.72,3603.86 cw(c1568.98,3586.17) LED8.5@1584.84,3595.32 ; LED140.5@1587.63,289.2 ccw(c1557.75,259.33) 1557.75,301.57 ccw(c1557.75,343.82) LED140.5@1587.63,313.95 ; LED128.5@1587.63,589.2 ccw(c1557.75,559.33) 1557.75,601.57 ccw(c1557.75,643.82) LED128.5@1587.63,613.95 ; LED116.5@1587.63,889.2 ccw(c1557.75,859.33) 1557.75,901.57 ccw(c1557.75,943.82) LED116.5@1587.63,913.95 ; LED104.5@1587.63,1189.2 ccw(c1557.75,1159.33) 1557.75,1201.57 ccw(c1557.75,1243.82) LED104.5@1587.63,1213.95 ; LED92.5@1587.63,1489.2 ccw(c1557.75,1459.33) 1557.75,1501.57 ccw(c1557.75,1543.82) LED92.5@1587.63,1513.95 ; LED80.5@1587.63,1789.2 ccw(c1557.75,1759.33) 1557.75,1801.57 ccw(c1557.75,1843.82) LED80.5@1587.63,1813.95 ; LED68.5@1587.63,2089.2 ccw(c1557.75,2059.33) 1557.75,2101.57 ccw(c1557.75,2143.82) LED68.5@1587.63,2113.95 ; LED56.5@1587.63,2389.2 ccw(c1557.75,2359.33) 1557.75,2401.57 ccw(c1557.75,2443.82) LED56.5@1587.63,2413.95 ; LED44.5@1587.63,2689.2 ccw(c1557.75,2659.33) 1557.75,2701.57 ccw(c1557.75,2743.82) LED44.5@1587.63,2713.95 ; LED32.5@1587.63,2989.2 ccw(c1557.75,2959.33) 1557.75,3001.57 ccw(c1557.75,3043.82) LED32.5@1587.63,3013.95 ; LED20.5@1587.63,3289.2 ccw(c1557.75,3259.33) 1557.75,3301.57 ccw(c1557.75,3343.82) LED20.5@1587.63,3313.95 ; LED8.5@1587.63,3589.2 ccw(c1557.75,3559.33) 1557.75,3601.57 ccw(c1557.75,3643.82) LED8.5@1587.63,3613.95 ; LED140.5@1612.37,289.2 cw(c1642.25,259.33) 1642.25,301.57 cw(c1642.25,343.82) LED140.5@1612.37,313.95 ; LED128.5@1612.37,589.2 cw(c1642.25,559.33) 1642.25,601.57 cw(c1642.25,643.82) LED128.5@1612.37,613.95 ; LED116.5@1612.37,889.2 cw(c1642.25,859.33) 1642.25,901.57 cw(c1642.25,943.82) LED116.5@1612.37,913.95 ; LED104.5@1612.37,1189.2 cw(c1642.25,1159.33) 1642.25,1201.57 cw(c1642.25,1243.82) LED104.5@1612.37,1213.95 ; LED92.5@1612.37,1489.2 cw(c1642.25,1459.33) 1642.25,1501.57 cw(c1642.25,1543.82) LED92.5@1612.37,1513.95 ; LED80.5@1612.37,1789.2 cw(c1642.25,1759.33) 1642.25,1801.57 cw(c1642.25,1843.82) LED80.5@1612.37,1813.95 ; LED68.5@1612.37,2089.2 cw(c1642.25,2059.33) 1642.25,2101.57 cw(c1642.25,2143.82) LED68.5@1612.37,2113.95 ; LED56.5@1612.37,2389.2 cw(c1642.25,2359.33) 1642.25,2401.57 cw(c1642.25,2443.82) LED56.5@1612.37,2413.95 ; LED44.5@1612.37,2689.2 cw(c1642.25,2659.33) 1642.25,2701.57 cw(c1642.25,2743.82) LED44.5@1612.37,2713.95 ; LED32.5@1612.37,2989.2 cw(c1642.25,2959.33) 1642.25,3001.57 cw(c1642.25,3043.82) LED32.5@1612.37,3013.95 ; LED20.5@1612.37,3289.2 cw(c1642.25,3259.33) 1642.25,3301.57 cw(c1642.25,3343.82) LED20.5@1612.37,3313.95 ; LED8.5@1612.37,3589.2 cw(c1642.25,3559.33) 1642.25,3601.57 cw(c1642.25,3643.82) LED8.5@1612.37,3613.95 ; LED140.5@1615.16,295.32 cw(c1631.02,286.17) 1626.28,303.86 ; LED140.5@1615.16,307.82 ccw(c1631.02,316.98) 1626.28,299.29 ; LED128.5@1615.16,595.32 cw(c1631.02,586.17) 1626.28,603.86 ; LED128.5@1615.16,607.82 ccw(c1631.02,616.98) 1626.28,599.29 ; LED116.5@1615.16,895.32 cw(c1631.02,886.17) 1626.28,903.86 ; LED116.5@1615.16,907.82 ccw(c1631.02,916.98) 1626.28,899.29 ; LED104.5@1615.16,1195.32 cw(c1631.02,1186.17) 1626.28,1203.86 ; LED104.5@1615.16,1207.82 ccw(c1631.02,1216.98) 1626.28,1199.29 ; LED92.5@1615.16,1495.32 cw(c1631.02,1486.17) 1626.28,1503.86 ; LED92.5@1615.16,1507.82 ccw(c1631.02,1516.98) 1626.28,1499.29 ; LED80.5@1615.16,1795.32 cw(c1631.02,1786.17) 1626.28,1803.86 ; LED80.5@1615.16,1807.82 ccw(c1631.02,1816.98) 1626.28,1799.29 ; LED68.5@1615.16,2095.32 cw(c1631.02,2086.17) 1626.28,2103.86 ; LED68.5@1615.16,2107.82 ccw(c1631.02,2116.98) 1626.28,2099.29 ; LED56.5@1615.16,2395.32 cw(c1631.02,2386.17) 1626.28,2403.86 ; LED56.5@1615.16,2407.82 ccw(c1631.02,2416.98) 1626.28,2399.29 ; LED44.5@1615.16,2695.32 cw(c1631.02,2686.17) 1626.28,2703.86 ; LED44.5@1615.16,2707.82 ccw(c1631.02,2716.98) 1626.28,2699.29 ; LED32.5@1615.16,2995.32 cw(c1631.02,2986.17) 1626.28,3003.86 ; LED32.5@1615.16,3007.82 ccw(c1631.02,3016.98) 1626.28,2999.29 ; LED20.5@1615.16,3295.32 cw(c1631.02,3286.17) 1626.28,3303.86 ; LED20.5@1615.16,3307.82 ccw(c1631.02,3316.98) 1626.28,3299.29 ; LED8.5@1615.16,3595.32 cw(c1631.02,3586.17) 1626.28,3603.86 ; LED8.5@1615.16,3607.82 ccw(c1631.02,3616.98) 1626.28,3599.29 ; LED140.5@1616.56,293.41 cw(c1624.87,290.57) 1627.15,299.06 ; LED140.5@1616.56,309.74 ccw(c1624.87,312.58) 1627.15,304.09 ; LED128.5@1616.56,593.41 cw(c1624.87,590.57) 1627.15,599.06 ; LED128.5@1616.56,609.74 ccw(c1624.87,612.58) 1627.15,604.09 ; LED116.5@1616.56,893.41 cw(c1624.87,890.57) 1627.15,899.06 ; LED116.5@1616.56,909.74 ccw(c1624.87,912.58) 1627.15,904.09 ; LED104.5@1616.56,1193.41 cw(c1624.87,1190.57) 1627.15,1199.06 ; LED104.5@1616.56,1209.74 ccw(c1624.87,1212.58) 1627.15,1204.09 ; LED92.5@1616.56,1493.41 cw(c1624.87,1490.57) 1627.15,1499.06 ; LED92.5@1616.56,1509.74 ccw(c1624.87,1512.58) 1627.15,1504.09 ; LED80.5@1616.56,1793.41 cw(c1624.87,1790.57) 1627.15,1799.06 ; LED80.5@1616.56,1809.74 ccw(c1624.87,1812.58) 1627.15,1804.09 ; LED68.5@1616.56,2093.41 cw(c1624.87,2090.57) 1627.15,2099.06 ; LED68.5@1616.56,2109.74 ccw(c1624.87,2112.58) 1627.15,2104.09 ; LED56.5@1616.56,2393.41 cw(c1624.87,2390.57) 1627.15,2399.06 ; LED56.5@1616.56,2409.74 ccw(c1624.87,2412.58) 1627.15,2404.09 ; LED44.5@1616.56,2693.41 cw(c1624.87,2690.57) 1627.15,2699.06 ; LED44.5@1616.56,2709.74 ccw(c1624.87,2712.58) 1627.15,2704.09 ; LED32.5@1616.56,2993.41 cw(c1624.87,2990.57) 1627.15,2999.06 ; LED32.5@1616.56,3009.74 ccw(c1624.87,3012.58) 1627.15,3004.09 ; LED20.5@1616.56,3293.41 cw(c1624.87,3290.57) 1627.15,3299.06 ; LED20.5@1616.56,3309.74 ccw(c1624.87,3312.58) 1627.15,3304.09 ; LED8.5@1616.56,3593.41 cw(c1624.87,3590.57) 1627.15,3599.06 ; LED8.5@1616.56,3609.74 ccw(c1624.87,3612.58) 1627.15,3604.09 ; LED140.4@1647.63,289.2 ccw(c1617.75,259.33) 1617.75,301.57 ccw(c1617.75,343.82) LED140.4@1647.63,313.95 ; LED128.4@1647.63,589.2 ccw(c1617.75,559.33) 1617.75,601.57 ccw(c1617.75,643.82) LED128.4@1647.63,613.95 ; LED116.4@1647.63,889.2 ccw(c1617.75,859.33) 1617.75,901.57 ccw(c1617.75,943.82) LED116.4@1647.63,913.95 ; LED104.4@1647.63,1189.2 ccw(c1617.75,1159.33) 1617.75,1201.57 ccw(c1617.75,1243.82) LED104.4@1647.63,1213.95 ; LED92.4@1647.63,1489.2 ccw(c1617.75,1459.33) 1617.75,1501.57 ccw(c1617.75,1543.82) LED92.4@1647.63,1513.95 ; LED80.4@1647.63,1789.2 ccw(c1617.75,1759.33) 1617.75,1801.57 ccw(c1617.75,1843.82) LED80.4@1647.63,1813.95 ; LED68.4@1647.63,2089.2 ccw(c1617.75,2059.33) 1617.75,2101.57 ccw(c1617.75,2143.82) LED68.4@1647.63,2113.95 ; LED56.4@1647.63,2389.2 ccw(c1617.75,2359.33) 1617.75,2401.57 ccw(c1617.75,2443.82) LED56.4@1647.63,2413.95 ; LED44.4@1647.63,2689.2 ccw(c1617.75,2659.33) 1617.75,2701.57 ccw(c1617.75,2743.82) LED44.4@1647.63,2713.95 ; LED32.4@1647.63,2989.2 ccw(c1617.75,2959.33) 1617.75,3001.57 ccw(c1617.75,3043.82) LED32.4@1647.63,3013.95 ; LED20.4@1647.63,3289.2 ccw(c1617.75,3259.33) 1617.75,3301.57 ccw(c1617.75,3343.82) LED20.4@1647.63,3313.95 ; LED8.4@1647.63,3589.2 ccw(c1617.75,3559.33) 1617.75,3601.57 ccw(c1617.75,3643.82) LED8.4@1647.63,3613.95 ; LED8.4@1647.63,3616.45 ccw(c1617.75,3646.32) 1660,3646.32 ccw(c1702.25,3646.32) LED8.4@1672.37,3616.45 ; v1@1650.86,3651.48 cw(c1635.02,3636.72) 1655.93,3631.12 ; v1@1651.16,3651.16 cw(c1629.82,3629.82) 1660,3629.82 cw(c1690.18,3629.82) v1@1668.84,3651.16 ; v1@1653.75,3649.17 cw(c1644.7,3633.51) 1662.18,3638.19 ; 1657.82,3638.19 cw(c1675.3,3633.51) v1@1666.25,3649.17 ; 1664.07,3631.12 cw(c1684.98,3636.72) v1@1669.14,3651.48